# Altium PCB electronic_stopwatch.PcbDoc
Units mm, origin at the board's own origin, x right, y up, seen from the top; angles counter-clockwise.
Board outline 99 x 79.5 mm, 2 copper layers (Top Layer, Bottom Layer); 26 components, 28 nets, 142 pads, 8 vias.
Unrouted connection lines stored in the file: 1.
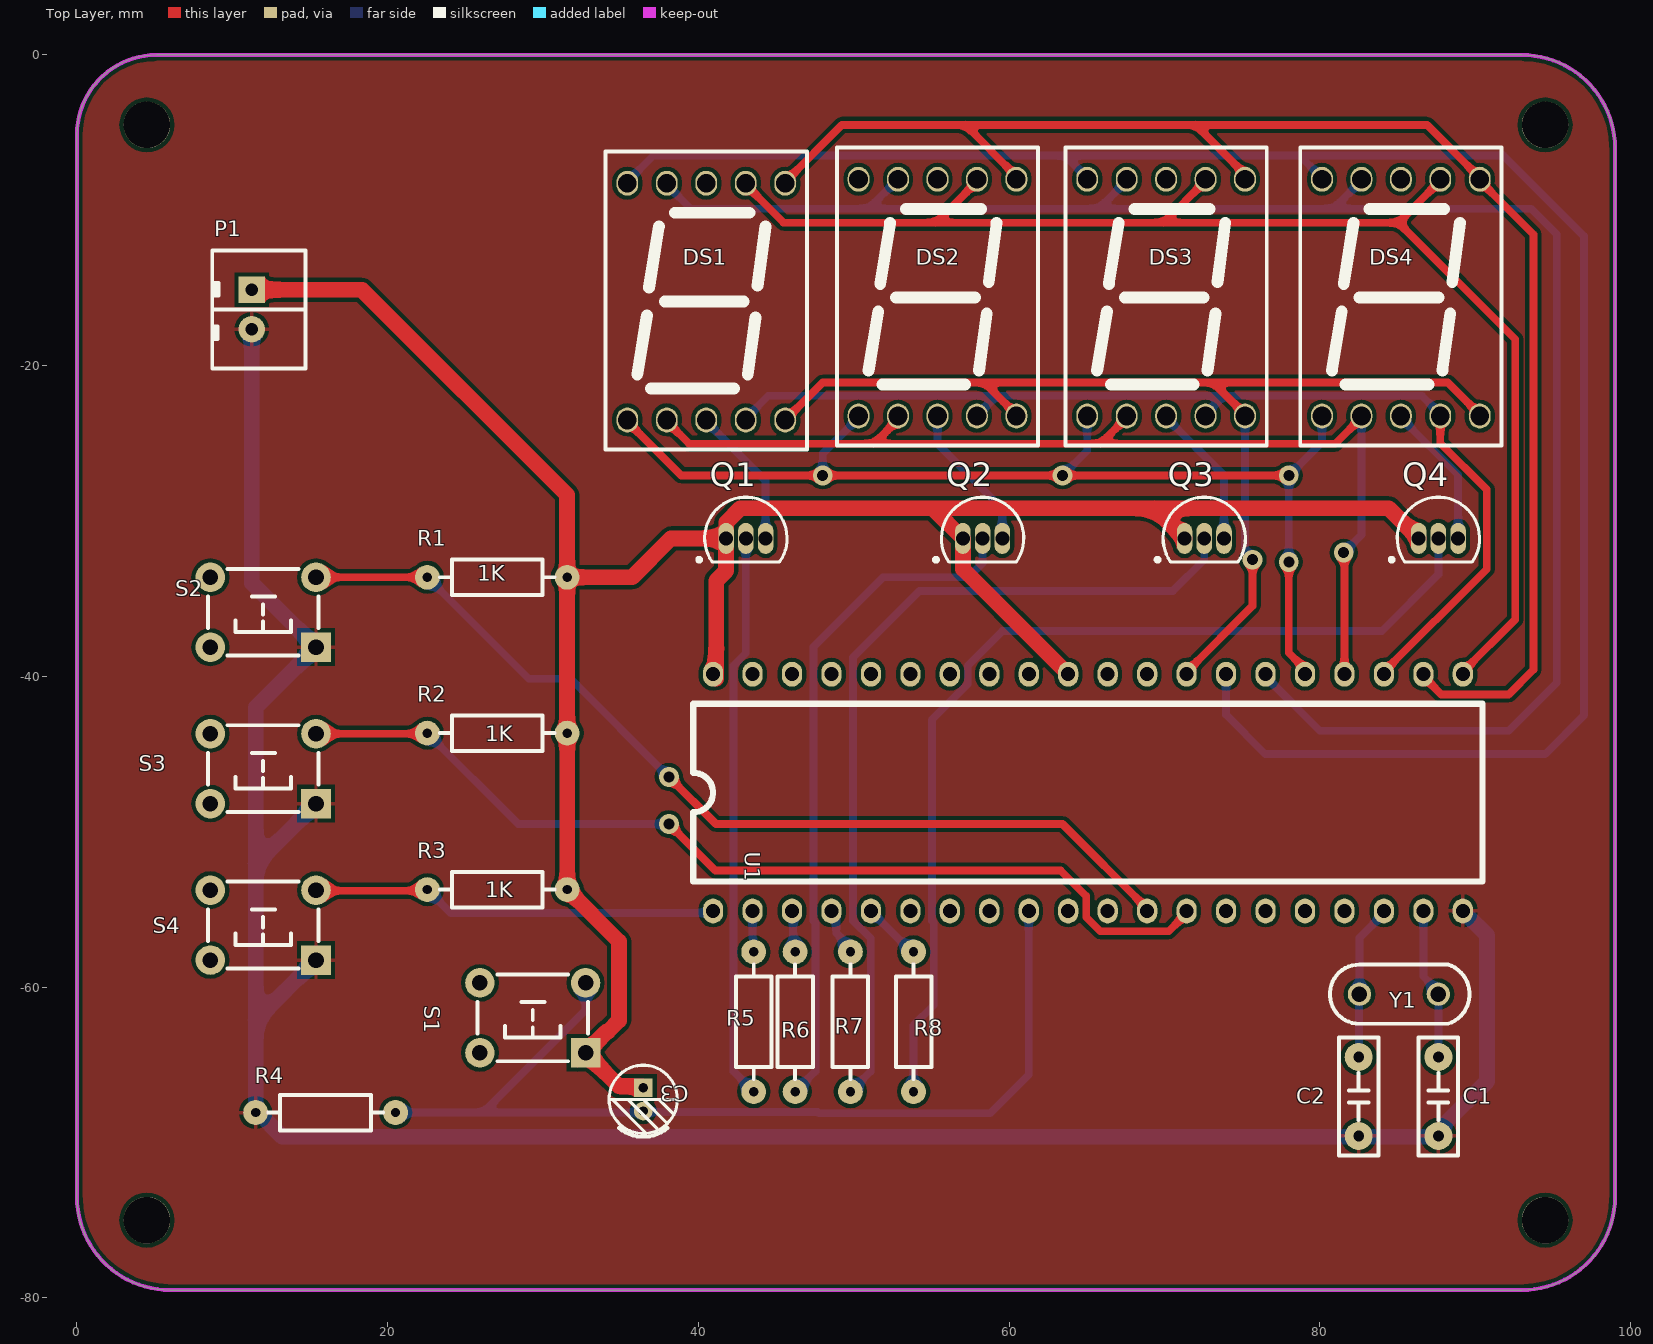
[diagram p0: Top Layer view]
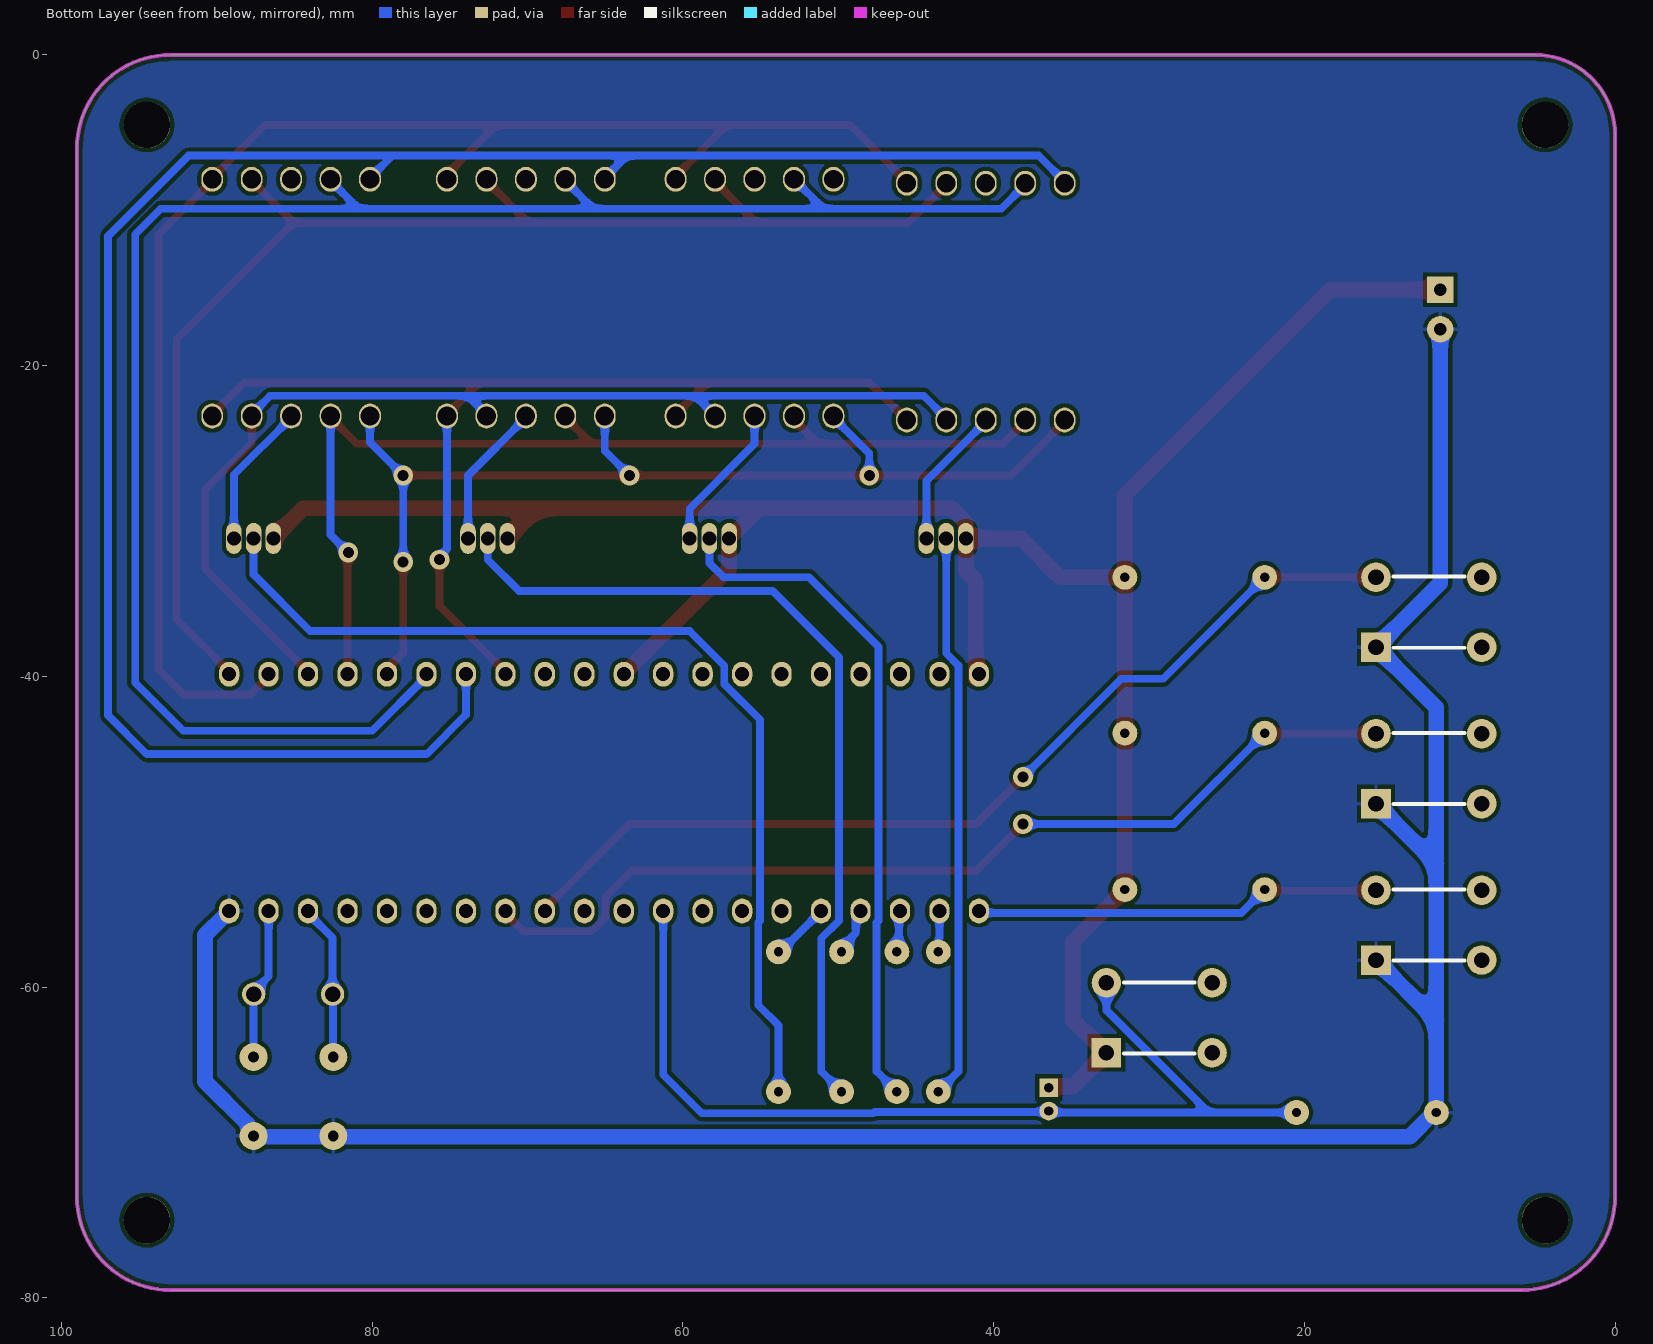
[diagram p1: Bottom Layer view, seen from below]
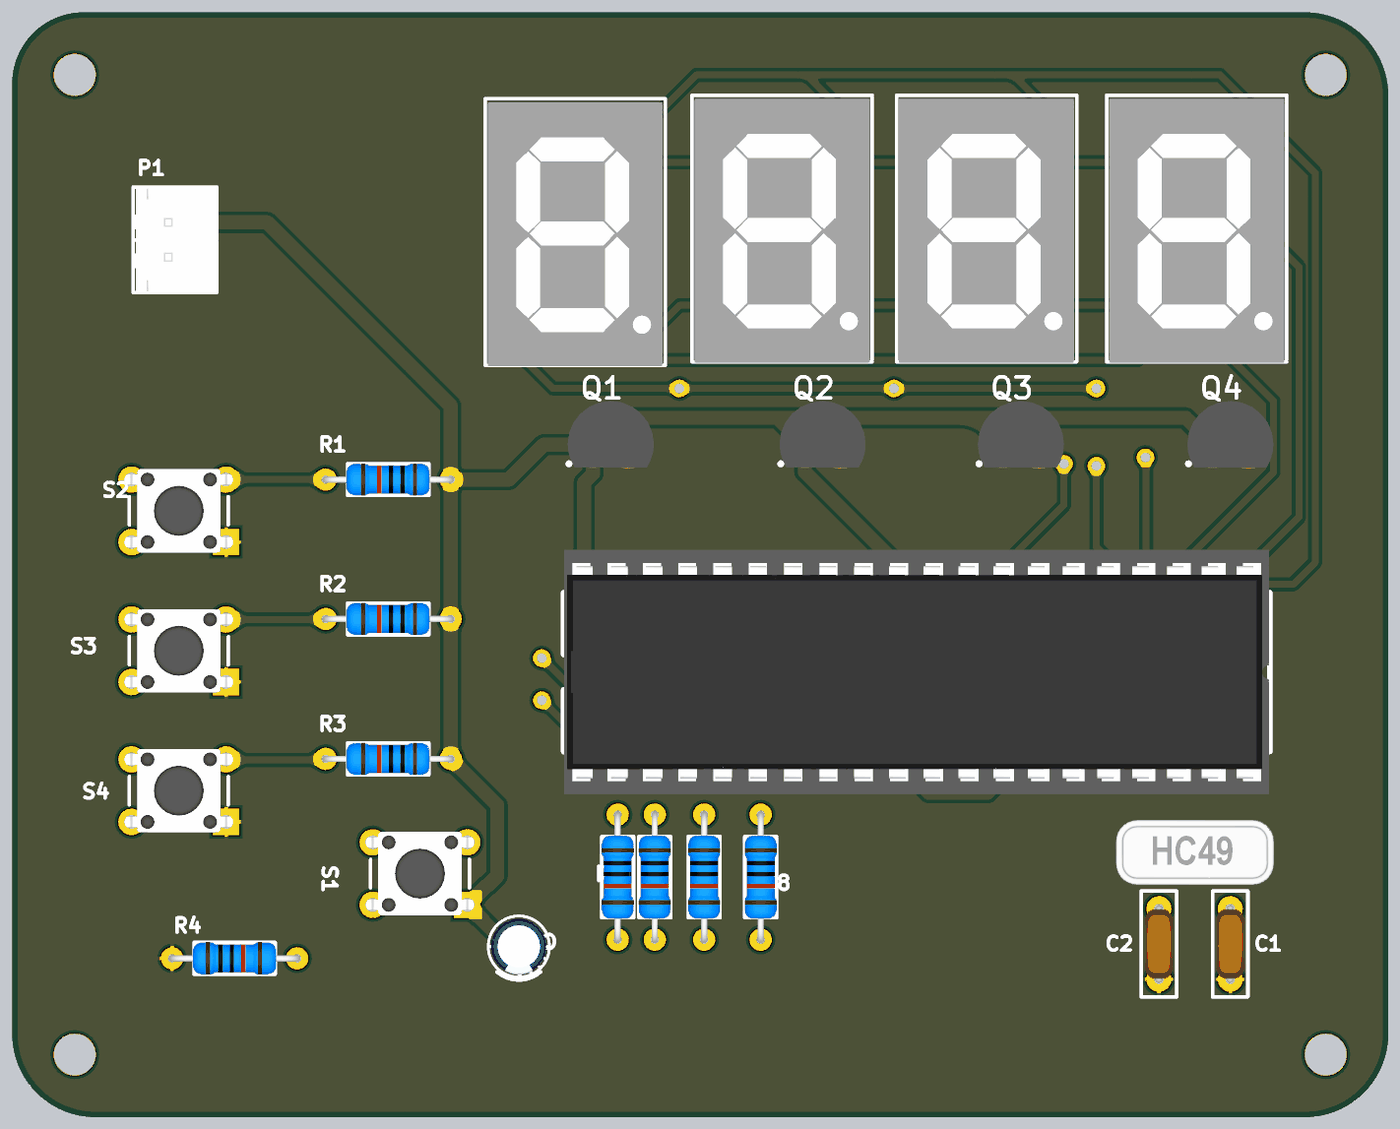
[diagram p2: 3D render of the assembled board from above, using the file's embedded part models]

## Layer stack, top to bottom
Top Solder: solder mask 0.0102, Solder Resist, Dk 3.5
Top Layer: signal copper 0.0356
Dielectric1: dielectric 0.32, FR-4, Dk 4.8
Bottom Layer: signal copper 0.0356
Bottom Solder: solder mask 0.0102, Solder Resist, Dk 3.5

## Board outline
0,-73.5 0,-5.121 cw(c5.121,-5.121) 5.121,0 93,0 cw(c93,-6) 99,-6 99,-73.5 cw(c93,-73.5) 93,-79.5 6,-79.5 cw(c6,-73.5)

## Design rules (kind name [scope] priority, off if disabled: settings)
Clearance [All] p1: gap=0.254 ignorepadtopadclearanceinfootprint=FALSE except(0: Arc-Hole Track-Hole SMDPad-Hole THPad-Hole Via-Hole Fill-Hole Poly-Hole Region-Hole Text-Hole)
FabricationTestPointUsage TestPointUsage [All] p1: valid=0 allowmultiple=FALSE
FabricationTestpoint Testpoint [(IsPad And (OnTopLayer Or OnBottomLayer))] p1: side=3 testpointundercomponent=TRUE minsize=1.016 maxsize=2.54 preferedsize=1.524 minholesize=0 maxholesize=1.016 preferedholesize=0.813 testpointgrid=0.025 allowsidetop=TRUE allowsidebottom=TRUE usegrid=TRUE gridtolerance=0
HoleSize [All] p1: absolutevalues=TRUE maxlimit=3 minlimit=0.025 maxpercent=80.000 minpercent=20.000
PolygonConnect [All] p1: connectstyle=Relief reliefconductorwidth=0.254 reliefentries=4 polygonreliefangle="90 Angle" airgapwidth=0.254
RoutingVias [All] p1: holewidth=0.711 width=1.27 viastyle="Through Hole" minholewidth=0.711 minwidth=1.27 maxholewidth=0.711 maxwidth=1.27
SolderMaskExpansion [All] p1: expansion=0.102 istentingtop=FALSE
Width Width_2 [InNet('GND')] p1: maxlimit=1.016 minlimit=1.016 preferedwidth=1.016
Width [InNet('VCC')] p2: maxlimit=1.016 minlimit=1.016 preferedwidth=1.016
Width Width_1 [All] p3: maxlimit=0.5 minlimit=0.5 preferedwidth=0.5
27 further rules are at their usual default settings.

## Classes and differential pairs
net class SEG[1..8]: SEG1 SEG2 SEG3 SEG4 SEG5 SEG6 SEG7 SEG8

## Components (designator, comment, footprint, x,y, rotation, side; value= is the part's Value field where it differs from the comment)
C1 "Cap" MLCC5.08-A 87.63,-67.04 r90 top value=30pF
C2 "Cap" MLCC5.08-A 82.5,-67.04 r90 top value=30pF
C3 "Cap Pol1" "CAP 1.5*4*8" 36.449,-67.225 r270 top value=1uF
DS1 "Dpy Blue-CA" SEG1_1_5611 40.505,-8.255 r0 top
DS2 "Dpy Blue-CA" SEG1_1_5611 55.388,-8.001 r0 top
DS3 "Dpy Blue-CA" SEG1_1_5611 70.104,-8.001 r0 top
DS4 "Dpy Blue-CA" SEG1_1_5611 85.217,-8.001 r0 top
P1 "Header 2" XH2.54-2P 11.25,-16.383 r270 top
Q1 "2N3906" to-92 43.053,-31.115 r270 top
Q2 "2N3906" to-92 58.293,-31.115 r270 top
Q3 "2N3906" to-92 72.559,-31.115 r270 top
Q4 "2N3906" to-92 87.63,-31.115 r270 top
R1 "1K" "RS 1/4W" 27.051,-33.619 r180 top value=1k
R2 "1K" "RS 1/4W" 27.051,-43.652 r180 top value=1k
R3 "1K" "RS 1/4W" 27.051,-53.721 r180 top value=1k
R4 "" "RS 1/4W" 16.002,-68.072 r0 top value=200
R5 "Res2" "RS 1/4W" 43.561,-62.23 r270 top value=200
R6 "Res2" "RS 1/4W" 46.228,-62.23 r270 top value=200
R7 "Res2" "RS 1/4W" 49.784,-62.23 r270 top value=200
R8 "Res2" "RS 1/4W" 53.848,-62.23 r270 top value=200
S1 "SW-PB" "TSW DIP-6*6*6" 29.337,-61.976 r180 top
S2 "SW-PB" "TSW DIP-6*6*6" 11.986,-35.869 r180 top
S3 "SW-PB" "TSW DIP-6*6*6" 11.986,-45.938 r180 top
S4 "SW-PB" "TSW DIP-6*6*6" 11.986,-56.007 r180 top
U1 "AT89C52" DIP40-600_MH带底座 40.944,-55.097 r0 top
Y1 "XTAL" cry卧式 82.55,-60.452 r0 top

## Footprints (in the part's own frame and the unit in brackets; to place one, negate y for a bottom-side part, rotate by r counter-clockwise, add the part's x,y. Pads: shape width x height; smd on the part's side, far side on the other; paste and mask are expansions set on the pad)
"CAP 1.5*4*8" [mm] "脚距1.5mm直径4mm高度8mm"
  rect 1.2x1.2 hole 0.6: 1(-0.75,0)
  round 1.2 hole 0.6: 2(0.75,0)
  silkscreen extent -2.2,-2.2 2.41,2.2, body extent -2,-2 2.02,2, height 8.04
cry卧式 [mm]
  round 1.5 hole 1: 1(0,0) 2(5.08,0)
  silkscreen extent -1.9,-1.91 7.08,1.91, body extent -3.13,-2.32 8.22,2.33, height 3.78
DIP40-600_MH带底座 [mm] "40脚直插芯片 间距2.54mm 600mil"
  oval 1.3x1.6 hole 0.9: 1(0,0) 2(2.54,0) 3(5.08,0) 4(7.62,0) 5(10.16,0) 6(12.7,0) 7(15.24,0) 8(17.78,0) 9(20.32,0) 10(22.86,0) 11(25.4,0) 12(27.94,0) 13(30.48,0) 14(33.02,0) 15(35.56,0) 16(38.1,0) 17(40.64,0) 18(43.18,0) 19(45.72,0) 20(48.26,0) 21(48.26,15.24) 22(45.72,15.24) 23(43.18,15.24) 24(40.64,15.24) 25(38.1,15.24) 26(35.56,15.24) 27(33.02,15.24) 28(30.48,15.24) 29(27.94,15.24) 30(25.4,15.24) 31(22.86,15.24) 32(20.32,15.24) 33(17.78,15.24) 34(15.24,15.24) 35(12.7,15.24) 36(10.16,15.24) 37(7.62,15.24) 38(5.08,15.24) 39(2.54,15.24) 40(0,15.24)
  silkscreen extent -1.27,1.91 49.53,13.33, body extent -1.22,-1.18 49.48,16.42, height 8.5
MLCC5.08-A [mm] "独石电容，脚距5.08mm"
  round 1.8 hole 0.7: 1(-2.54,0) 2(2.54,0)
  silkscreen extent -3.81,-1.27 3.81,1.27, body extent -2.79,-1 2.79,1, height 3.71
"RS 1/4W" [mm] "直插色环电阻，脚距9mm，直径2.3mm"
  round 1.6 hole 0.6: 1(-4.5,0) 2(4.5,0)
  silkscreen extent -3.68,-1.14 3.68,1.14, body extent -4.72,-1.16 4.73,1.16, height 2.32
SEG1_1_5611 [mm] "0.56寸一位数码管"
  round 1.016 on Top Overlay: 0(4.318,-13.081)
  oval 1.4x1.6 hole 1.2: 1(-5.08,-15.24) 2(-2.54,-15.24) 3(0,-15.24) 4(2.54,-15.24) 5(5.08,-15.24) 6(5.08,0) 7(2.54,0) 8(0,0) 9(-2.54,0) 10(-5.08,0)
  silkscreen extent -6.48,-17.14 6.48,2.03, body extent -6.3,-17.22 6.3,1.78, height 8
to-92 [mm]
  oval 2x1 hole 0.9: 1(0,-1.27) 2(0,0) 3(0,1.27)
  silkscreen extent -2.65,-3.13 1.52,2.65, body extent -3.15,-3.09 1.66,3.11, height 10.31
"TSW DIP-6*6*6" [mm] "6*6*6mm"
  rect 1.9x1.9 hole 1: 1(-3.4,2.25)
  round 1.9 hole 1: 2(-3.4,-2.25) 3(3.4,-2.25) 4(3.4,2.25)
  silkscreen extent -3.56,-2.79 3.56,2.79, body extent -4.11,-3 4.11,3, height 5.95
XH2.54-2P [mm]
  rect 1.7x1.7 hole 0.83: 1(-1.27,0)
  round 1.7 hole 0.83: 2(1.27,0)
  silkscreen extent -3.81,-2.54 3.79,3.46, body extent -3.72,-2.37 3.68,3.38, height 7

## Part data
C1 C2: "Capacitor", LatestRevisionDate=17-Jul-2002, LatestRevisionNote="Re-released for DXP Platform.", PackageReference=RAD-0.3, Published=8-Jun-2000, Publisher="Altium Limited"
C3: "Polarized Capacitor (Radial)", LatestRevisionDate=17-Jul-2002, LatestRevisionNote="Re-released for DXP Platform.", PackageReference=RB7.6-15, Published=8-Jun-2000, Publisher="Altium Limited"
DS1 DS2 DS3 DS4: "14.2 mm General Purpose Blue 7-Segment Display: CA, RH DP, Gray Surface", Colour=Blue, PackageDocument=24-Sep-2002, ComponentLink1Description="Manufacturer Link", ComponentLink1URL=http://www.agilent.com/, DatasheetDocument=24-Sep-2002, LatestRevisionDate=17-Dec-2003, LatestRevisionNote="Schematic revised, PCB Footprint replaced.", MinimumIntensity="2020 ucd", Note="IF = 10 mA", PackageReference=H, Published=8-Jun-2000, Publisher="Altium Limited"
P1: "Header, 2-Pin", LatestRevisionDate=17-Jul-2002, LatestRevisionNote="Re-released for DXP Platform.", Publisher="Altium Limited"
Q1 Q2 Q3 Q4: "PNP General Purpose Amplifier", PackageDocument=Sep-1998, Code_JEDEC=TO-92A, ComponentLink1Description="Manufacturer Link", ComponentLink1URL=http://www.fairchildsemi.com/, ComponentLink2Description=Datasheet, ComponentLink2URL=http://www.fairchildsemi.com/ds/2N%2F2N3906.pdf, DatasheetDocument=1997, LatestRevisionDate=15-Jan-2003, LatestRevisionNote="PCB Footprint 'BCY-W3/D4.7' replaced", PackageReference=TO-92A, Published=8-Jun-2000, Publisher="Altium Limited"
R1 R2 R3 R4: library part Res2, "Resistor", LatestRevisionDate=17-Jul-2002, LatestRevisionNote="Re-released for DXP Platform.", PackageReference=AXIAL-0.4, Published=8-Jun-2000, Publisher="Altium Limited"
R5 R6 R7 R8: "Resistor", LatestRevisionDate=17-Jul-2002, LatestRevisionNote="Re-released for DXP Platform.", PackageReference=AXIAL-0.4, Published=8-Jun-2000, Publisher="Altium Limited"
S1 S2 S3 S4: "Switch", LatestRevisionDate=17-Jul-2002, LatestRevisionNote="Re-released for DXP Platform.", PackageReference=SPST-2, Published=24-Mar-1999, Publisher="Altium Limited"
Y1: "Crystal Oscillator", LatestRevisionDate=17-Jul-2002, LatestRevisionNote="Re-released for DXP Platform.", PackageReference=R38, Published=8-Jun-2000, Publisher="Altium Limited"

## Free pads (board coordinates)
  round 3 hole 3: 0(4.5,-75) 0(4.5,-4.5) 0(94.5,-75) 0(94.5,-4.5)

## Via types
v1: diameter 1.27, hole 0.711, Top Layer to Bottom Layer, 8 vias

## Nets (pads, with @x,y where several pads share a name; then routed paths per layer and width w, separated by ;. In a path a pad name is that pad's centre, name@x,y a point inside that pad or via, vN(x,y) a via of type N, cw(c..) or ccw(c..) an arc to the next point about the centre after c; other vN are vias at no path point)
EN1: DS1.3 Q1.3 | length 9.2
  Bottom Layer w0.5: DS1.3 40.505,-23.595 44.323,-27.413 Q1.3
EN2: DS2.3 Q2.3 | length 9.6
  Bottom Layer w0.5: DS2.3 55.388,-25.031 59.563,-29.206 Q2.3
EN3: DS3.3 Q3.3 | length 9.4
  Bottom Layer w0.5: DS3.3 70.104,-23.341 73.829,-27.066 Q3.3
EN4: DS4.3 Q4.3 | length 9.4
  Bottom Layer w0.5: DS4.3 85.217,-23.341 88.9,-27.024 Q4.3
GND: C1.1 C2.1 P1.2 R4.1 S2.1 S3.1 S4.1 U1.20 | length 158
  Bottom Layer w1.016: P1.2 11.25,-33.982 S2.1 11.502,-42.003 11.502,-52.072 ; S4.1 11.502,-62.141 ; S3.1 11.502,-52.072 ; U1.20 89.204,-55.171 89.423,-55.389 89.496,-55.389 90.765,-56.658 90.765,-66.065 88.022,-68.808 88.022,-68.976 87.63,-69.368 C1.1 87.576,-69.634 13.222,-69.634 11.66,-68.072 R4.1 11.502,-62.141 ; 11.502,-62.141 11.502,-52.072
KEY1: R1.2 S2.2 U1.12 | length 62.5
  Top Layer w0.5: S2.2 R1.2 ; v1(38.1,-46.471) 41.129,-49.5 63.437,-49.5 68.884,-54.947 U1.12
  Bottom Layer w0.5: R1.2 29.082,-40.15 31.779,-40.15 v1(38.1,-46.471)
KEY2: R2.2 S3.2 U1.13 | length 62.8
  Top Layer w0.5: S3.2 22.515,-43.688 R2.2 ; v1(38.1,-49.5) 41.1,-52.5 63.316,-52.5 64.958,-54.143 64.958,-55.493 65.866,-56.401 70.27,-56.401 71.424,-55.247 U1.13
  Bottom Layer w0.5: R2.2 28.399,-49.5 v1(38.1,-49.5)
KEY3: R3.2 S4.2 U1.1 | length 26.3
  Top Layer w0.5: S4.2 15.428,-53.799 22.473,-53.799 R3.2
  Bottom Layer w0.5: R3.2 24.054,-55.224 40.817,-55.224 U1.1
NetC1_2: C1.2 U1.19 Y1.2 | length 9.8
  Bottom Layer w0.5: U1.19 86.664,-59.297 87.63,-60.262 Y1.2 C1.2
NetC2_2: C2.2 U1.18 Y1.1 | length 10.1
  Bottom Layer w0.5: C2.2 82.525,-64.475 82.525,-60.477 Y1.1 82.55,-56.822 84.124,-55.247 U1.18
NetC3_2: C3.2 R4.2 S1.2 U1.9 | length 63.5
  Bottom Layer w0.5: R4.2 26.162,-68.072 ; S1.2 32.737,-61.497 26.162,-68.072 ; U1.9 61.264,-65.643 58.785,-68.122 47.755,-68.122 47.667,-68.034 36.508,-68.034 C3.2 36.352,-68.072 26.162,-68.072
NetQ1_2: Q1.2 R5.2 | length 36.5
  Bottom Layer w0.5: Q1.2 43.053,-38.507 42.257,-39.303 42.257,-65.426 R5.2
NetQ2_2: Q2.2 R6.2 | length 43.9
  Bottom Layer w0.5: R6.2 47.532,-65.426 47.532,-55.847 47.41,-55.725 47.41,-38.09 51.881,-33.619 57.378,-33.619 58.293,-32.704 Q2.2
NetQ3_2: Q3.2 R7.2 | length 55.6
  Bottom Layer w0.5: R7.2 51.088,-65.426 51.088,-56.863 49.95,-55.725 49.95,-38.775 54.226,-34.5 70.543,-34.5 72.559,-32.484 Q3.2
NetQ4_2: Q4.2 R8.2 | length 64
  Bottom Layer w0.5: R8.2 53.848,-62.463 55.152,-61.159 55.152,-55.847 55.03,-55.725 55.03,-42.793 57.338,-40.485 57.338,-39.309 59.563,-37.084 83.983,-37.084 87.63,-33.437 Q4.2
S1: R5.1 U1.2 | length 3.4
  Bottom Layer w0.254: R5.1@43.561,-58.42 R5.1
  Bottom Layer w0.5: U1.2 43.484,-56.819 43.561,-56.896 R5.1
S2: R6.1 U1.3 | length 3.4
  Bottom Layer w0.254: R6.1@46.228,-58.42 R6.1
  Bottom Layer w0.5: U1.3 46.094,-55.167 46.094,-57.596 R6.1
S3: R7.1 U1.4 | length 3.1
  Bottom Layer w0.5: U1.4 48.564,-55.464 48.762,-55.662 48.762,-55.679 48.866,-55.784 48.866,-56.515 49.784,-57.432 R7.1
S4: R8.1 U1.5 | length 3.9
  Bottom Layer w0.5: U1.5 51.104,-55.235 51.226,-55.356 51.344,-55.356 53.717,-57.73 R8.1
SEG1: DS1.7 DS2.7 DS3.7 DS4.7 U1.21 | length 88.7
  Top Layer w0.254: DS1.7@43.053,-8.255 DS1.7@43.053,-8.001
  Top Layer w0.5: DS1.7 43.045,-8.355 45.485,-10.795 55.29,-10.795 ; DS2.7 57.928,-8.157 55.29,-10.795 ; DS3.7 72.644,-8.101 69.95,-10.795 ; DS4.7 87.757,-8.101 85.063,-10.795 ; U1.21 89.204,-39.707 92.57,-36.341 92.57,-18.302 85.063,-10.795 ; 55.29,-10.795 69.95,-10.795 ; 69.95,-10.795 85.063,-10.795
SEG2: DS1.6 DS2.6 DS3.6 DS4.6 U1.22 | length 98.9
  Top Layer w0.5: DS1.6 45.585,-8.155 49.24,-4.5 57.166,-4.5 ; DS2.6 60.468,-7.802 57.166,-4.5 ; DS3.6 75.184,-7.684 72,-4.5 ; U1.22 86.664,-40.007 87.818,-41.161 92.148,-41.161 93.744,-39.565 93.744,-11.548 90.297,-8.101 DS4.6 90.297,-7.901 86.896,-4.5 72,-4.5 ; 57.166,-4.5 72,-4.5
SEG3: DS1.4 DS2.4 DS3.4 DS4.4 U1.23 | length 70.2
  Top Layer w0.5: U1.23 84.124,-39.707 90.74,-33.092 90.74,-27.965 87.757,-24.982 DS4.4
  Bottom Layer w0.5: DS1.4 43.045,-23.395 44.503,-21.937 59.198,-21.937 ; DS2.4 57.928,-23.207 59.198,-21.937 ; DS3.4 72.644,-23.122 73.829,-21.937 ; DS4.4 87.757,-23.127 86.567,-21.937 73.829,-21.937 ; 59.198,-21.937 73.829,-21.937
SEG4: DS1.2 DS2.2 DS3.2 DS4.2 U1.24 | length 68.5
  Top Layer w0.254: DS3.2@68.114,-23.453 DS3.2@68.114,-23.241
  Top Layer w0.5: DS1.2 37.965,-23.595 39.4,-25.031 51.285,-25.031 ; DS2.2 52.848,-23.468 51.285,-25.031 ; DS3.2 67.564,-23.341 65.874,-25.031 ; v1(81.534,-32.031) 81.584,-32.081 U1.24 ; DS4.2 82.677,-23.341 80.987,-25.031 65.874,-25.031 ; 51.285,-25.031 65.874,-25.031
  Bottom Layer w0.5: v1(81.534,-32.031) 82.677,-30.888 DS4.2
SEG5: DS1.1 DS2.1 DS3.1 DS4.1 U1.25 | length 71.2
  Top Layer w0.5: DS1.1 35.425,-23.595 38.896,-27.066 v1(48,-27.066) v1(63.437,-27.066) v1(78,-27.066) ; v1(78,-32.635) 78,-38.477 79.044,-39.521 U1.25
  Bottom Layer w0.5: v1(48,-27.066) 48,-25.649 50.308,-23.341 DS2.1 ; v1(63.437,-27.066) 65.024,-25.479 DS3.1 ; v1@78,-32.486 v1(78,-27.066) 80.137,-24.929 DS4.1
SEG6: DS1.9 DS2.9 DS3.9 DS4.9 U1.26 | length 117.2
  Bottom Layer w0.5: DS1.9 37.965,-8.355 37.973,-8.363 39.516,-9.906 50.943,-9.906 ; DS2.9 50.943,-9.906 ; DS3.9 67.564,-8.101 65.759,-9.906 ; U1.26 76.504,-40.007 79.997,-43.5 92.148,-43.5 95.246,-40.402 95.246,-11.541 93.611,-9.906 80.872,-9.906 ; DS4.9 82.677,-8.101 80.872,-9.906 ; 50.943,-9.906 65.759,-9.906 ; 65.759,-9.906 80.872,-9.906
SEG7: DS1.10 DS2.10 DS3.10 DS4.10 U1.27 | length 127.3
  Bottom Layer w0.5: DS1.10 35.425,-8.155 37.103,-6.477 63.6,-6.477 ; DS3.10 65.024,-7.901 63.6,-6.477 ; U1.27 73.964,-42.468 76.496,-45 94.5,-45 97,-42.5 97,-11.66 91.817,-6.477 78.713,-6.477 ; DS4.10 80.137,-7.901 78.713,-6.477 ; 63.6,-6.477 78.713,-6.477
SEG8: DS1.5 DS2.5 DS3.5 DS4.5 U1.28 | length 71.9
  Top Layer w0.254: DS2.5@60.664,-23.241 DS2.5@60.664,-23.029 ; DS4.5@90.424,-23.241 DS4.5@90.805,-23.241
  Top Layer w0.5: DS1.5 45.587,-23.495 48,-21.082 58.409,-21.082 ; DS2.5 60.468,-23.141 58.409,-21.082 ; U1.28 71.424,-39.707 75.669,-35.462 v1(75.669,-32.486) ; DS3.5 75.184,-23.141 73.125,-21.082 ; DS4.5 90.297,-23.141 88.238,-21.082 73.125,-21.082 ; 58.409,-21.082 73.125,-21.082
  Bottom Layer w0.5: DS3.5 75.184,-31.792 75.669,-32.278 v1(75.669,-32.486)
VCC: C3.1 P1.1 Q1.1 Q2.1 Q3.1 Q4.1 R1.1 R2.1 R3.1 S1.1 U1.31 U1.40 | length 153
  Top Layer w1.016: P1.1 18.339,-15.113 31.551,-28.325 R1.1 ; C3.1 36.357,-66.383 34.894,-66.383 S1.1 34.103,-62.86 34.175,-62.86 34.894,-62.141 34.894,-57.064 R3.1 R2.1 R1.1 ; U1.40@41.148,-40.132 41.148,-33.839 41.783,-33.204 Q1.1 ; U1.31 63.804,-39.784 63.673,-39.653 63.6,-39.653 57.031,-33.084 57.031,-31.123 55.089,-29.181 ; Q3.1 69.356,-29.181 ; Q4.1 84.426,-29.181 69.356,-29.181 ; R1.1 35.736,-33.619 38.24,-31.115 Q1.1 ; Q1.1 41.791,-31.107 41.791,-30.092 42.702,-29.181 55.089,-29.181 ; 55.089,-29.181 69.356,-29.181
pads on no net: DS1.0 DS1.8 DS2.0 DS2.8 DS3.0 DS3.8 DS4.0 DS4.8 S1.3 S1.4 S2.3 S2.4 S3.3 S3.4 S4.3 S4.4 U1.6 U1.7 U1.8 U1.10 U1.11 U1.14 U1.15 U1.16 U1.17 U1.29 U1.30 U1.32 U1.33 U1.34 U1.35 U1.36 U1.37 U1.38 U1.39

## Polygon pours and split planes (outlines as drawn)
GND on Top Layer "GND_L01_P1002" (solid, remove dead copper, pour order 1002): 0,-2.54 cw(c2.54,-2.54) 2.54,0 96.46,0 cw(c96.46,-2.54) 99,-2.54 99,-76.96 cw(c96.46,-76.96) 96.46,-79.5 2.54,-79.5 cw(c2.54,-76.96) 0,-76.96
GND on Bottom Layer "GND_L02_P1003" (solid, remove dead copper, pour order 1003): 0,-33.982 0,-4.5 0,-2.54 cw(c2.54,-2.54) 2.54,0 91.817,0 96.46,0 cw(c96.46,-2.54) 99,-2.54 99,-76.96 cw(c96.46,-76.96) 96.46,-79.5 2.54,-79.5 cw(c2.54,-76.96) 0,-76.96 0,-69.232 0,-5.121

## Keep-outs
Keep-Out Layer:
  the board outline again, w0.254